# EAGLE board detector328p-pu (EAGLE 7.6.0)
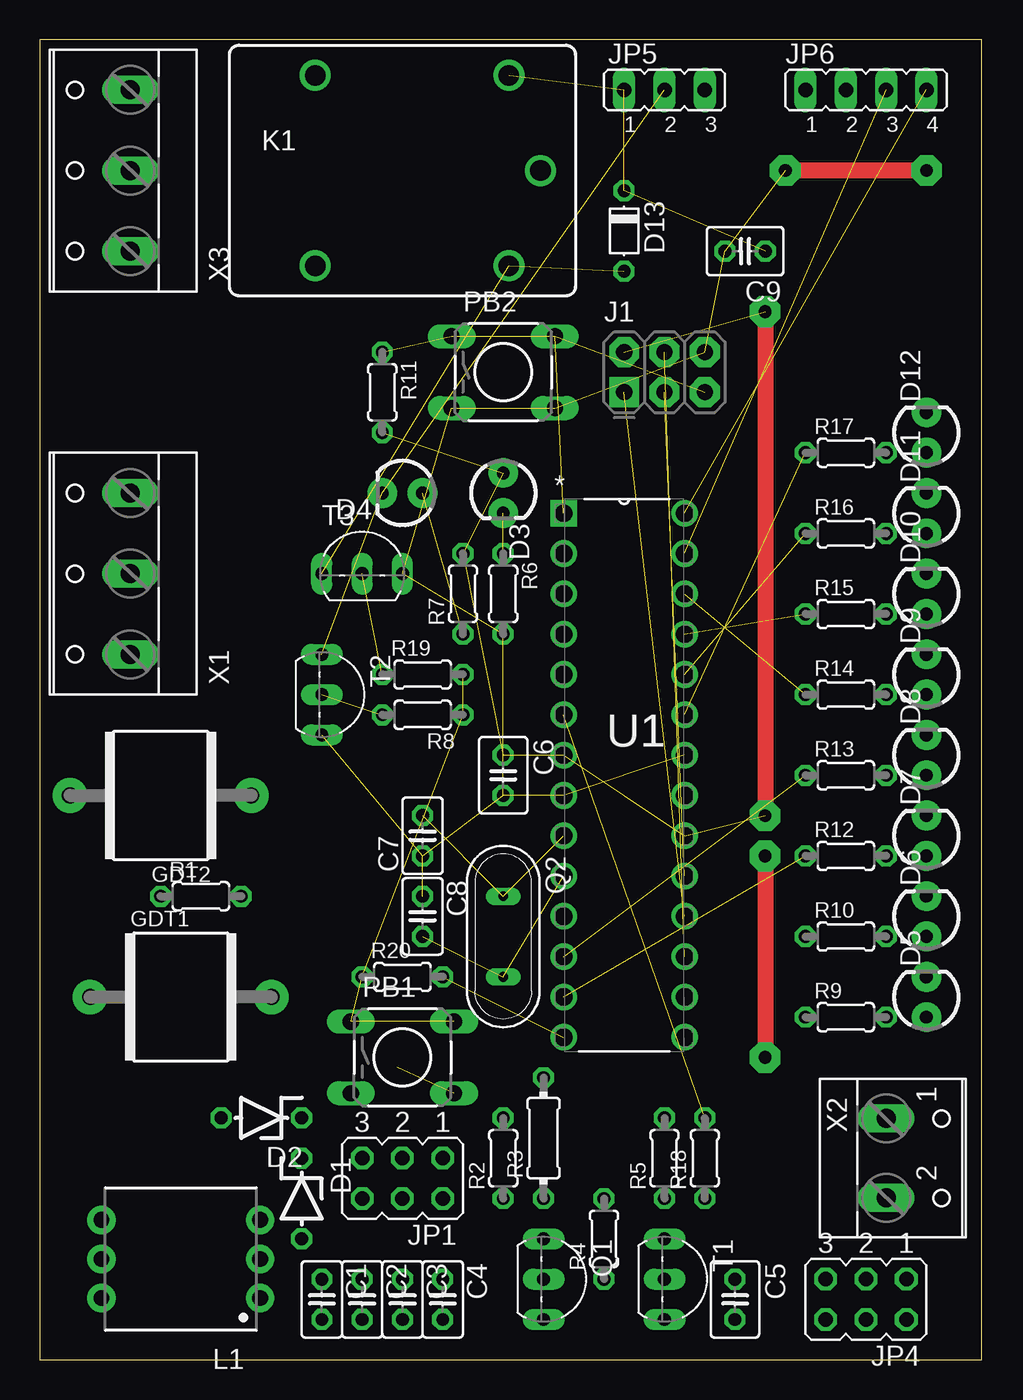
[diagram p0: board, top side]
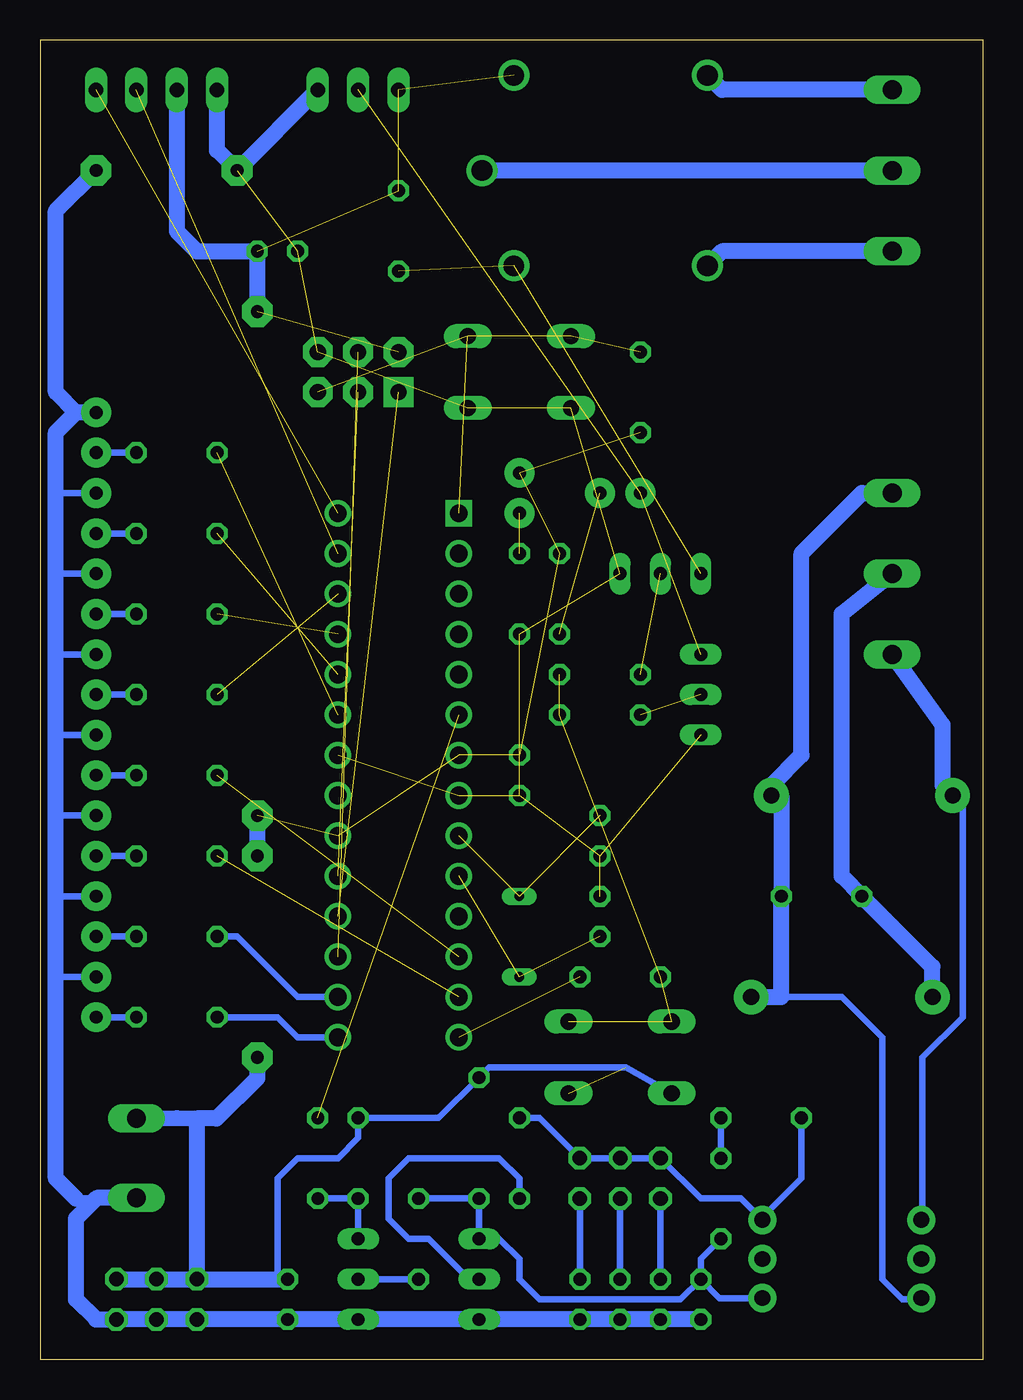
[diagram p1: board, bottom side, seen from below]

Size 59.36 x 83.17 mm. Coordinates in mm from the lower left corner, seen from the top.
Outline: 0,0 59.36,0 59.36,83.17 0,83.17 0,0
Copper layers (1*16): Top 0.035mm / dielectric 1.5mm / Bottom 0.035mm
Design rules "default": minimum track width 10mil, minimum drill 24mil, track to track 8mil, track to pad 8mil, pad to pad 8mil, via to via 8mil, smd to smd 8mil, copper to edge 40mil, drill to drill 8mil, minimum pad ring 10mil, minimum via ring 8mil, stop-mask expansion 4mil, vias tented up to drill 0mil, thermal gap 10mil
Net classes: 0 default: width 0.305 mm

## Footprints (pad centres in the part's own frame; a part is rotated, then mirrored left to right if it is on the bottom)
C025-025X050 = drill 0.813 octagon: 1 -1.27,0; 2 1.27,0
C025-030X050 = drill 0.813 octagon: 1 -1.27,0; 2 1.27,0
ZDIO-5 = drill 0.813 octagon: A 2.54,0; C -2.54,0
LED3MM = drill 0.813 pad 1.88: A -1.27,0; K 1.27,0
D-5 = drill 0.813 octagon: A 2.54,0; C -2.54,0
CG5350L = drill 1.016 pad 2.184: 1 -5.715,0; 2 5.715,0
2X3-NS = drill 1.016 pad 1.88 square: 1 -2.54,-1.27 | drill 1.016 pad 1.88 octagon: 2 -2.54,1.27; 3 0,-1.27; 4 0,1.27; 5 2.54,-1.27; 6 2.54,1.27
JP3Q = drill 0.914 octagon: 1 -2.54,-1.27; 2 -2.54,1.27; 3 0,-1.27; 4 0,1.27; 5 2.54,-1.27; 6 2.54,1.27
JP2 = drill 0.914 long: 1 -2.54,0; 2 0,0; 3 2.54,0
JP4 = drill 0.914 long: 1 -3.81,0; 2 -1.27,0; 3 1.27,0; 4 3.81,0
JS-M = drill 1.3: 1 6.7,6; 2 6.7,-6; C 8.7,0; NC -5.5,-6; NO -5.5,6
78601/9C = drill 1 pad 1.778: 1 -5,2.46; 2 -5,0; 3 -5,-2.46; 4 5,-2.46; 5 5,0; 6 5,2.46
TAC-SWITCH-PTH = drill 1.016 pad 1.524 long: 1 -3.251,2.261; 2 3.251,2.261; 3 -3.251,-2.261; 4 3.251,-2.261
TO92-DGS = drill 0.813 long: D -2.54,0; G 0,0; S 2.54,0
QS = drill 0.61 long: 1 -2.54,0; 2 2.54,0
0204/5 = drill 0.813 octagon: 1 -2.54,0; 2 2.54,0
0204/7 = drill 0.813 octagon: 1 -3.81,0; 2 3.81,0
TO92-CBE = drill 0.813 long: B 0,0; C -2.54,0; E 2.54,0
DIP254P762X457-28 = drill 1.118 square: 1 -7.62,33.02 | drill 1.118: 2 -7.62,30.48; 3 -7.62,27.94; 4 -7.62,25.4; 5 -7.62,22.86; 6 -7.62,20.32; 7 -7.62,17.78; 8 -7.62,15.24; 9 -7.62,12.7; 10 -7.62,10.16; 11 -7.62,7.62; 12 -7.62,5.08; 13 -7.62,2.54; 14 -7.62,0; 15 0,0; 16 0,2.54; 17 0,5.08; 18 0,7.62; 19 0,10.16; 20 0,12.7; 21 0,15.24; 22 0,17.78; 23 0,20.32; 24 0,22.86; 25 0,25.4; 26 0,27.94; 27 0,30.48; 28 0,33.02
W237-133 = drill 1.194 long: 1 -5.08,-0.635; 2 0,-0.635; 3 5.08,-0.635
W237-102 = drill 1.194 long: 1 -2.5,-1.27; 2 2.5,-1.27

## Placement (x,y rotation side)
C1  100n  [C025-025X050]  17.78,3.81 270 top
C2  47n  [C025-025X050]  20.32,3.81 270 top
C3  33n  [C025-025X050]  22.86,3.81 270 top
C4  22n  [C025-025X050]  25.4,3.81 270 top
C5  1u  [C025-030X050]  43.81,3.81 270 top
C6  1u  [C025-030X050]  29.21,36.83 270 top
C7  22p  [C025-025X050]  24.13,33.02 90 top
C8  22p  [C025-025X050]  24.13,27.94 270 top
C9  1u  [C025-030X050]  44.45,69.85 180 top
D1  24V  [ZDIO-5]  16.51,10.16 270 top
D2  24V  [ZDIO-5]  13.97,15.24 180 top
D3  R  [LED3MM]  29.21,54.61 270 top
D4  B  [LED3MM]  22.86,54.61 180 top
D5  R  [LED3MM]  55.88,22.86 90 top
D6  R  [LED3MM]  55.88,27.94 90 top
D7  Y  [LED3MM]  55.88,33.02 90 top
D8  Y  [LED3MM]  55.88,38.1 90 top
D9  Y  [LED3MM]  55.88,43.18 90 top
D10  Y  [LED3MM]  55.88,48.26 90 top
D11  G  [LED3MM]  55.88,53.34 90 top
D12  G  [LED3MM]  55.88,58.42 90 top
D13  [D-5]  36.83,71.12 270 top
GDT1  GDT-CG5350L  [CG5350L]  8.89,22.86 0 top
GDT2  GDT-CG5350L  [CG5350L]  7.62,35.56 180 top
J1  AVR_SPI_PRG_6NS  [2X3-NS]  39.37,62.23 0 top
JP1  [JP3Q]  22.86,11.43 180 top
JP4  [JP3Q]  52.07,3.81 180 top
JP5  [JP2]  39.37,80.01 0 top
JP6  [JP4]  52.07,80.01 0 top
K1  SRD-05VDC-SL-C  [JS-M]  22.86,74.93 0 top
L1  78601/9C  [78601/9C]  8.89,6.35 180 top
PB1  TACTILE-SWITCH-PTH  [TAC-SWITCH-PTH]  22.86,19.05 0 top
PB2  TACTILE-SWITCH-PTH  [TAC-SWITCH-PTH]  29.21,62.23 0 top
Q1  BS170.  [TO92-DGS]  31.75,5.08 270 top
Q2  16MHz  [QS]  29.21,26.67 270 top
R1  1M8  [0204/5]  10.16,29.21 0 top
R2  470  [0204/5]  29.21,12.7 90 top
R3  75  [0204/7]  31.75,13.97 90 top
R4  4k7  [0204/5]  35.56,7.62 90 top
R5  1k  [0204/5]  39.37,12.7 90 top
R6  1k  [0204/5]  29.21,48.26 270 top
R7  1k  [0204/5]  26.67,48.26 90 top
R8  4k7  [0204/5]  24.13,40.64 180 top
R9  1k  [0204/5]  50.8,21.59 0 top
R10  1k  [0204/5]  50.8,26.67 0 top
R11  10k  [0204/5]  21.59,60.96 270 top
R12  1k  [0204/5]  50.8,31.75 0 top
R13  1k  [0204/5]  50.8,36.83 0 top
R14  1k  [0204/5]  50.8,41.91 0 top
R15  1k  [0204/5]  50.8,46.99 0 top
R16  1k  [0204/5]  50.8,52.07 0 top
R17  1k  [0204/5]  50.8,57.15 0 top
R18  4k7  [0204/5]  41.91,12.7 90 top
R19  4k7  [0204/5]  24.13,43.18 0 top
R20  1k  [0204/5]  22.86,24.13 0 top
T1  BC337  [TO92-CBE]  39.37,5.08 270 top
T2  BC337  [TO92-CBE]  17.78,41.91 270 top
T3  BC337  [TO92-CBE]  20.32,49.53 0 top
U1  ATMEGA328P-PU  [DIP254P762X457-28]  40.64,20.32 0 top
X1  [W237-133]  5.08,49.53 90 top
X2  [W237-102]  54.61,12.7 270 top
X3  [W237-133]  5.08,74.93 90 top

## Library data of the parts
C1-C4 C7 C8 R1-R20 = resistor
C5 C6 C9 = rcl
D1 D2 D13 = diode
D3-D12 = SparkFun-LED; PROD_ID: DIO-08794
GDT1 GDT2 = supressor
J1 = SparkFun-Connectors
JP1 JP4-JP6 = jumper
K1 L1 Q1 = detector
PB1 PB2 = GeekAmmo
Q2 = special
T1-T3 = transistor
U1 = Atmel_By_element14_Batch_1-00; MPN: ATMEGA328P-PU; OC_FARNELL: 1715487; OC_NEWARK: 15R0268; PACKAGE: PDIP-28; SUPPLIER: Atmel
X1 X3 = con-wago-508; OC_FARNELL: unknown; OC_NEWARK: unknown
X2 = con-wago-500; MPN: 237-102; OC_FARNELL: unknown; OC_NEWARK: 70K9898

## Nets
FREQ: R5.1 R18.1 T1.C
GND: C1.2 C2.2 C3.2 C4.2 C5.2 C6.2 C7.1 C8.1 C9.2 D5.K D6.K D7.K D8.K D9.K D10.K D11.K D12.K J1.6 JP4.2 JP4.4 JP4.6 JP5.3 JP6.1 PB2.3 PB2.4 Q1.S R6.2 T1.E T2.E T3.E U1.8 U1.22 X2.2
GND-ISO: GDT1.1 R1.1 X1.2
N$1: D1.C D2.C
N$2: R4.1 T1.B
N$3: Q1.G R2.1
N$4: C3.1 JP1.4
N$5: C4.1 JP1.2
N$6: D2.A JP1.1 JP1.3 JP1.5 L1.3 R2.2
N$7: GDT2.2 L1.4 X1.1
N$8: C7.2 Q2.1 U1.9
N$9: R18.2 U1.6
N$10: C8.2 Q2.2 U1.10
N$11: C2.1 JP1.6
N$12: J1.1 U1.18
N$13: J1.4 U1.17
N$14: C1.1 D1.A L1.1 Q1.D R3.1 R4.2
N$15: J1.3 U1.19
N$16: D8.A R13.2
N$17: D9.A R14.2
N$18: D10.A R15.2
N$19: D11.A R16.2
N$20: R8.2 T2.B
N$21: R20.2 U1.14
N$22: D3.K R6.1
N$23: D4.K JP5.2 T2.C
N$24: D4.A R7.1
N$25: R13.1 U1.12
N$26: R12.1 U1.13
N$27: D7.A R12.2
N$28: R14.1 U1.26
N$29: R15.1 U1.25
N$30: JP6.4 U1.28
N$31: R16.1 U1.24
N$32: D12.A R17.2
N$33: R17.1 U1.23
N$34: D6.A R10.2
N$35: D5.A R9.2
N$36: R10.1 U1.16
N$37: R9.1 U1.15
N$38: PB1.1 PB1.2 R8.1 R19.2 R20.1
N$39: D13.A K1.2 T3.C
N$40: R19.1 T3.B
N$41: K1.NC X3.1
N$42: K1.NO X3.3
N$43: K1.C X3.2
N$44: J1.5 PB2.1 PB2.2 R11.1 U1.1
N$45: JP6.3 U1.27
N$47: GDT1.2 GDT2.1 L1.6 R1.2 X1.3
VCC: C5.1 C6.1 C9.1 D3.A D13.C J1.2 JP4.1 JP4.3 JP4.5 JP5.1 JP6.2 K1.1 PB1.3 PB1.4 R3.2 R5.2 R7.2 R11.2 U1.7 U1.20 X2.1

## Tracks (layer width: path | path; a pad name or v marks a point on that pad's centre or on a via)
FREQ
  Bottom 0.406: R18.1 R5.1 T1.C
GND  (via drill 0.8 pad 1.93)  (12 unrouted)
  Top 1.016: v55.88,74.93 v46.99,74.93
  Bottom 0.406: X2.2 53.34,10.16 57.15,10.16 | D11.K 58.42,54.61 | D10.K 58.42,49.53 | D9.K 58.42,44.45 | D8.K 58.42,39.37 | D7.K 58.42,34.29 | D6.K 58.42,29.21 | D5.K 58.42,24.13
  Bottom 1.016: C1.2 C2.2 C3.2 C4.2 Q1.S T1.E C5.2 JP4.6 JP4.4 JP4.2 55.88,2.54 57.15,3.81 57.15,8.89 55.84,10.2 X2.2 | 57.15,10.16 58.42,11.43 58.42,24.13 58.42,29.21 58.42,34.29 58.42,39.37 58.42,44.45 58.42,49.53 58.42,54.61 58.42,58.42 57.15,59.69 | D12.K 57.15,59.69 | 57.15,59.69 58.42,60.96 58.42,72.39 v55.88,74.93 | JP5.3 v46.99,74.93 48.26,76.2 JP6.1
GND-ISO
  Bottom 1.016: GDT1.1 3.17,24.77 R1.1 8.89,30.48 8.89,46.99 X1.2
N$1
  Bottom 0.406: D1.C D2.C
N$2
  Bottom 0.406: R4.1 T1.B
N$3
  Bottom 0.406: R2.1 29.21,11.43 30.48,12.7 36.2,12.7 37.47,11.43 37.47,8.89 36.2,7.62 34.92,7.62 32.38,5.08 Q1.G
N$4
  Bottom 0.406: JP1.4 C3.1
N$5
  Bottom 0.406: JP1.2 C4.1
N$6
  Bottom 0.406: R2.2 27.94,15.24 JP1.1 JP1.3 JP1.5 17.78,10.16 15.24,10.16 L1.3 13.89,8.97 11.43,11.43 D2.A
N$7
  Bottom 0.406: L1.4 3.81,8.81 3.81,19.05 1.27,21.59 1.27,34.92 GDT2.2
  Bottom 1.016: GDT2.2 2.54,36.2 2.54,40.01 X1.1
N$8  (2 unrouted)
N$9  (1 unrouted)
N$10  (2 unrouted)
N$11
  Bottom 0.406: JP1.6 C2.1
N$12  (1 unrouted)
N$13  (1 unrouted)
N$14
  Bottom 0.406: R4.2 R3.1 Q1.D 30.48,7.62 29.21,6.35 29.21,5.08 27.94,3.81 19.05,3.81 C1.1 | D1.A 17.78,6.35 C1.1 | C1.1 16.59,3.89 L1.1
N$15  (1 unrouted)
N$16
  Bottom 0.406: R13.2 D8.A
N$17
  Bottom 0.406: R14.2 D9.A
N$18
  Bottom 0.406: D10.A R15.2
N$19
  Bottom 0.406: R16.2 D11.A
N$20  (1 unrouted)
N$21  (1 unrouted)
N$22  (1 unrouted)
N$23  (2 unrouted)
N$24  (1 unrouted)
N$25  (1 unrouted)
N$26  (1 unrouted)
N$27
  Bottom 0.406: R12.2 D7.A
N$28  (1 unrouted)
N$29  (1 unrouted)
N$30  (1 unrouted)
N$31  (1 unrouted)
N$32
  Bottom 0.406: D12.A R17.2
N$33  (1 unrouted)
N$34
  Bottom 0.406: R10.2 D6.A
N$35
  Bottom 0.406: R9.2 D5.A
N$36
  Bottom 0.406: U1.16 43.18,22.86 46.99,26.67 R10.1
N$37
  Bottom 0.406: U1.15 43.18,20.32 44.45,21.59 R9.1
N$38  (4 unrouted)
N$39  (2 unrouted)
N$40  (1 unrouted)
N$41
  Bottom 1.016: X3.1 16.44,69.85 K1.NC
N$42
  Bottom 1.016: X3.3 16.44,80.01 K1.NO
N$43
  Bottom 1.016: X3.2 K1.C
N$44  (4 unrouted)
N$45  (1 unrouted)
N$47
  Bottom 0.406: L1.6 3.97,3.81 5.08,3.81 6.35,5.08 6.35,20.32 8.89,22.86 12.7,22.86
  Bottom 1.016: GDT1.2 12.7,22.86 R1.2 12.7,35.56 GDT2.1 13.34,36.2 11.43,38.1 11.43,50.8 7.62,54.61 X1.3
VCC  (via drill 0.8 pad 1.93)  (11 unrouted)
  Top 1.016: v45.72,66.04 v45.72,34.29 | v45.72,31.75 v45.72,19.05
  Bottom 0.406: C5.1 44.45,5.08 44.45,11.43 43.18,12.7 40.64,12.7 39.37,13.97 R5.2 34.29,15.24 R3.2 31.11,18.41 22.5,18.41 PB1.3
  Bottom 1.016: JP4.1 JP4.3 JP4.5 | JP4.5 C5.1 | X2.1 50.8,15.24 49.53,15.2 | 49.53,15.2 JP4.5 | JP6.2 50.8,71.12 49.53,69.85 C9.1 v45.72,66.04 | v45.72,34.29 v45.72,31.75 | v45.72,19.05 45.72,17.74 48.26,15.24 48.3,15.2 49.53,15.2